# Altium PCB PCB2.PcbDoc
Units mm, origin at the board's own origin, x right, y up, seen from the top; angles counter-clockwise.
Board outline 27.05 x 25 mm, 2 copper layers (Top Layer, Bottom Layer); 12 components, 12 nets, 43 pads, 10 vias.
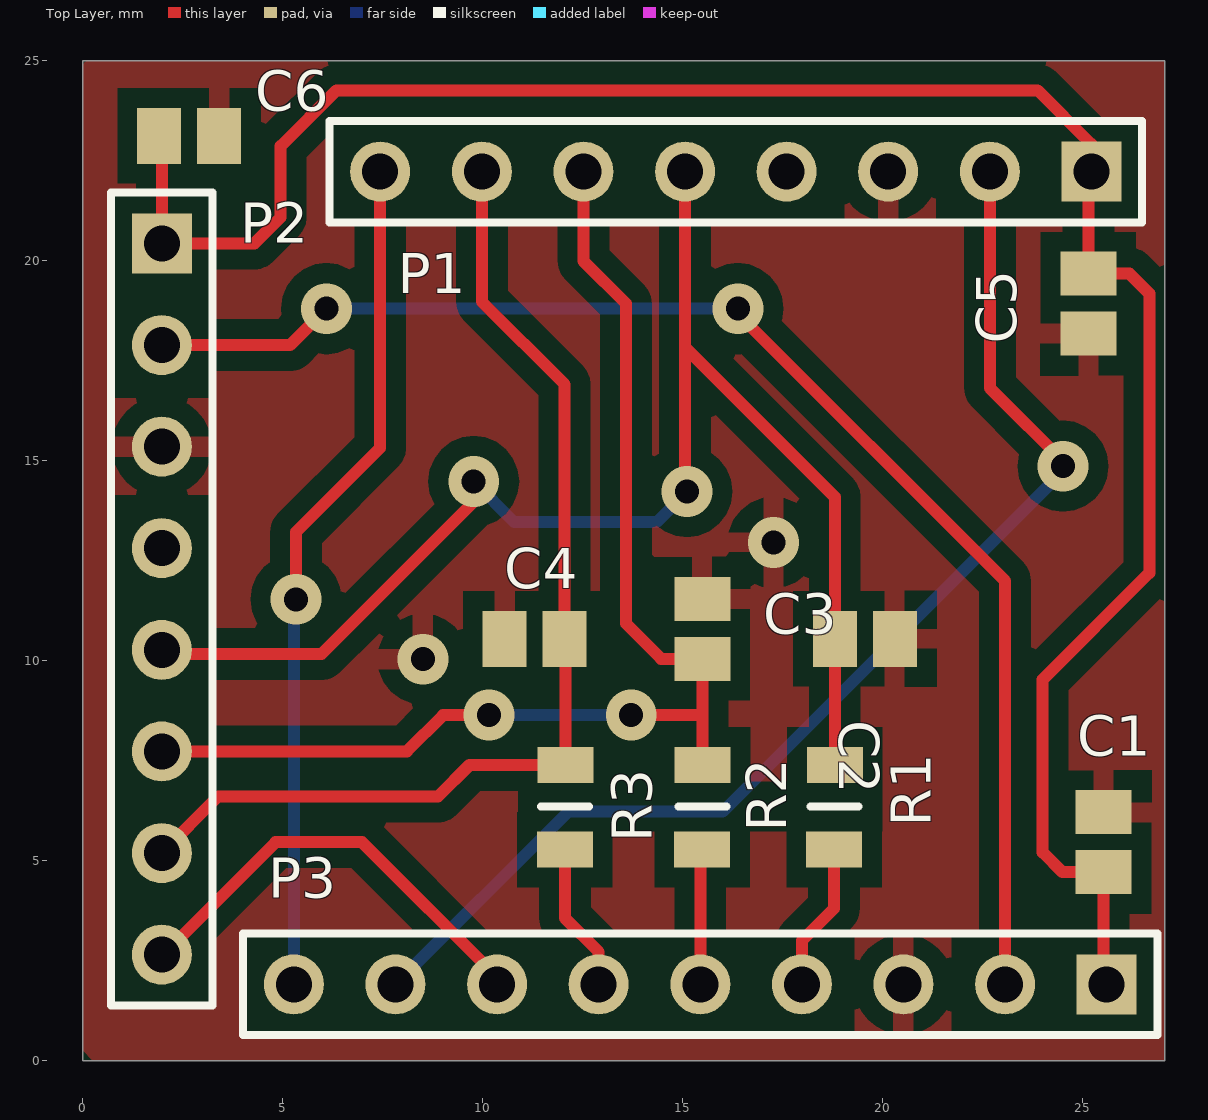
[diagram p0: Top Layer view]
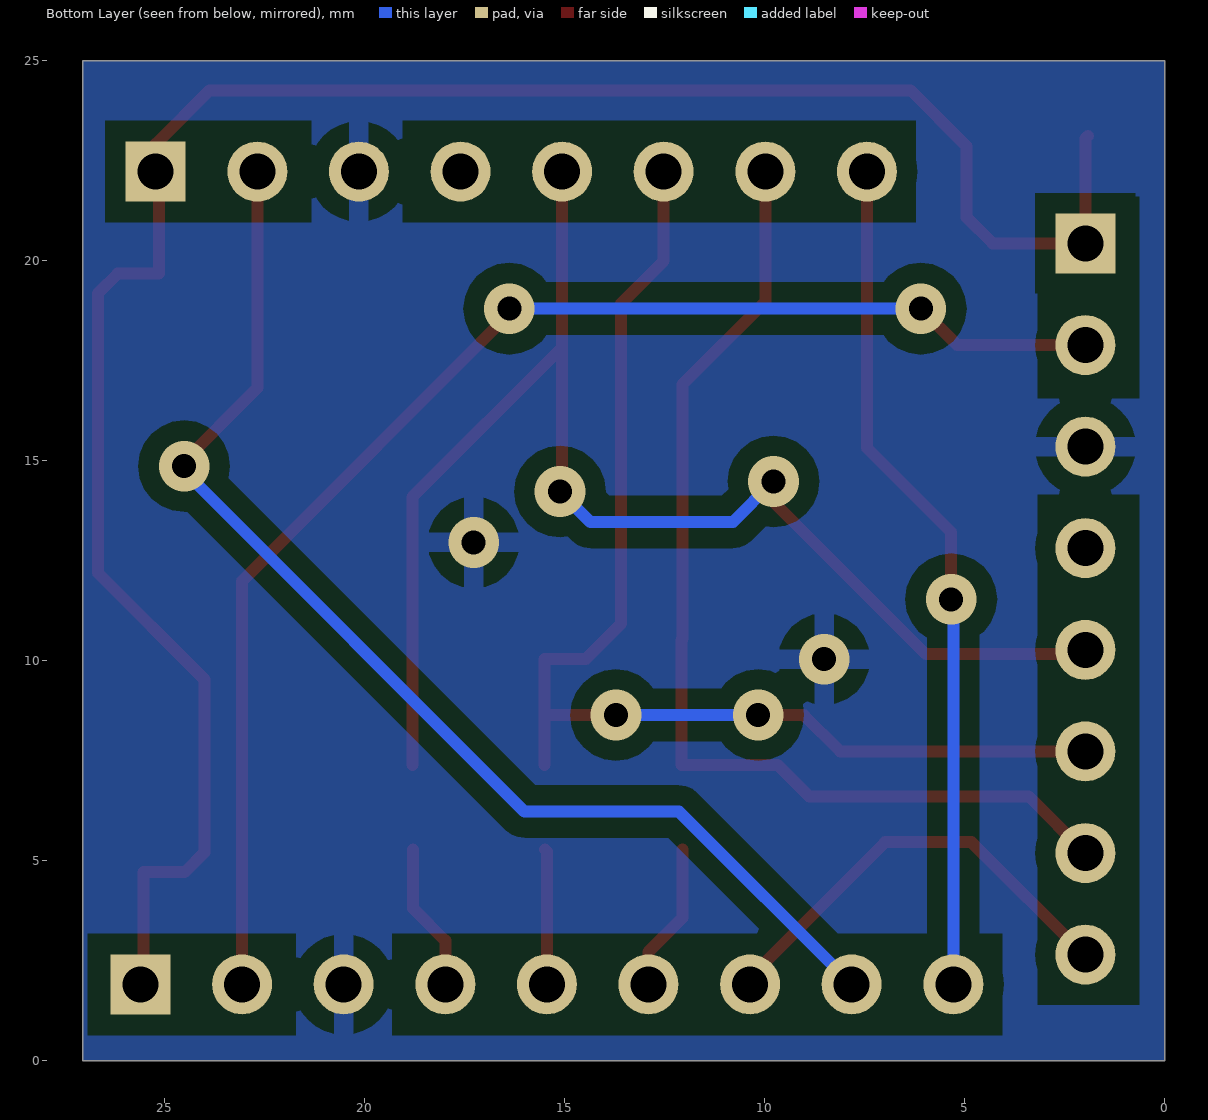
[diagram p1: Bottom Layer view, seen from below]

## Layer stack, top to bottom
Top Solder: solder mask 0.0102, Solder Resist, Dk 3.5
Top Layer: signal copper 0.0356
Dielectric 1: dielectric 0.32, FR-4, Dk 4.8
Bottom Layer: signal copper 0.0356
Bottom Solder: solder mask 0.0102, Solder Resist, Dk 3.5

## Board outline
0,0 0,25 27.051,25 27.051,0

## Design rules (kind name [scope] priority, off if disabled: settings)
Clearance [All] p1: gap=0.3
PlaneConnect [All] p1: planeconnectstyle=Relief reliefexpansion=0.5 reliefentries=4 reliefconductorwidth=0.5 reliefairgap=0.5
PolygonConnect [All] p1: connectstyle=Relief reliefconductorwidth=0.5 reliefentries=4 polygonreliefangle="90 Angle" airgapwidth=0.5
RoutingVias [All] p1: holewidth=0.6 width=1.5 viastyle="Through Hole" minholewidth=0.6 minwidth=1.27 maxholewidth=0.9 maxwidth=1.6
SolderMaskExpansion [All] p1: expansion=0.102
Width [All] p1: maxlimit=0.5 minlimit=0.3 preferedwidth=0.3
28 further rules are at their usual default settings.

## Components (designator, comment, footprint, x,y, rotation, side; value= is the part's Value field where it differs from the comment)
C1 "Cap" C0805 25.527,5.461 r270 top
C2 "Cap" C0805 19.558,10.541 r180 top
C3 "Cap" C0805 15.494,10.795 r90 top
C4 "Cap" C0805 11.303,10.541 r180 top
C5 "Cap" C0805 25.146,18.923 r90 top
C6 "Cap" C0805 2.667,23.114 r180 top
P1 "Header 8" HDR1X8 25.222,22.225 r180 top locked
P2 "Header 8" HDR1X8 1.981,20.428 r270 top locked
P3 "Header 9" HDR1X9 25.603,1.905 r180 top locked
R1 "Res2" 6-0805_N 18.796,6.35 r270 top
R2 "Res2" 6-0805_N 15.494,6.35 r270 top
R3 "Res2" 6-0805_N 12.065,6.35 r270 top

## Footprints (in the part's own frame and the unit in brackets; to place one, negate y for a bottom-side part, rotate by r counter-clockwise, add the part's x,y. Pads: shape width x height; smd on the part's side, far side on the other; paste and mask are expansions set on the pad)
6-0805_N [mm] "Chip Resistor, Body 2.0x1.2mm, IPC Medium Density"
  rect 0.9x1.4 smd: 1(-1.039,0.009) 2(1.078,-0.007)
  silkscreen extent 0,-0.6 0,0.6, body extent -1.07,-0.7 1.07,0.7, height 0.7
C0805 [mm]
  rect 1.1x1.4 smd: 1(-0.75,0) 2(0.75,0)
  body extent -1.1,-0.72 1.1,0.72, height 1.4
HDR1X8 [mm] "Connector; Header; 8 Position"
  rect 1.5x1.5 hole 0.9: 1(0,0)
  round 1.5 hole 0.9: 2(2.54,0) 3(5.08,0) 4(7.62,0) 5(10.16,0) 6(12.7,0) 7(15.24,0) 8(17.78,0)
  silkscreen extent -1.27,-1.27 19.05,1.27
HDR1X9 [mm] "Connector; Header; 9 Position"
  rect 1.5x1.5 hole 0.9: 1(0,0)
  round 1.5 hole 0.9: 2(2.54,0) 3(5.08,0) 4(7.62,0) 5(10.16,0) 6(12.7,0) 7(15.24,0) 8(17.78,0) 9(20.32,0)
  silkscreen extent -1.27,-1.27 21.59,1.27

## Part data
C1 C2 C3 C4 C5 C6: "Capacitor"
P1 P2: "Header, 8-Pin"
P3: "Header, 9-Pin"
R1 R2 R3: "Resistor"

## Via types
v1: diameter 1.27, hole 0.6, Top Layer to Bottom Layer, 10 vias

## Nets (pads, with @x,y where several pads share a name; then routed paths per layer and width w, separated by ;. In a path a pad name is that pad's centre, name@x,y a point inside that pad or via, vN(x,y) a via of type N, cw(c..) or ccw(c..) an arc to the next point about the centre after c; other vN are vias at no path point)
3.3V: C1.2 C5.2 C6.2 P1.1 P2.1 P3.1 | length 54.2
  Top Layer w0.3: C6.2 1.981,23.05 P2.1 4.299,20.428 4.953,21.082 4.953,22.86 6.35,24.257 23.876,24.257 25.222,22.911 P1.1 25.146,22.149 C5.2 26.174,19.673 26.67,19.177 26.67,12.192 24.003,9.525 24.003,5.207 24.499,4.711 C1.2 25.527,2.286 25.908,1.905 P3.1
GND: C1.1 C2.1 C3.2 C4.2 C5.1 C6.1 P1.3 P2.3 P3.3 | length 0.2
  Top Layer w0.3: v1(17.272,12.954) v1@17.399,12.827
  other v1: 8.509,10.033
MISO: C2.2 P1.5 P2.5 R1.1 | length 36.2
  Top Layer w0.3: P2.5 2.089,10.16 5.969,10.16 9.97,14.16 v1@9.97,14.541 ; P1.5 15.062,17.831 ; v1(15.113,14.224) 15.062,14.275 15.062,17.831 ; R1.1 18.805,14.088 15.062,17.831
  Bottom Layer w0.3: v1(9.779,14.478) 10.795,13.462 14.351,13.462 v1(15.113,14.224)
MOSI: C3.1 P1.6 P2.6 R2.1 | length 30.6
  Top Layer w0.3: P2.6 8.109,7.728 9.017,8.636 v1(10.16,8.636) ; P1.6 12.522,19.99 13.589,18.923 13.589,10.922 14.466,10.045 C3.1 15.503,10.036 15.503,8.636 ; v1(13.716,8.636) 15.503,8.636 ; R2.1 15.503,8.636
  Bottom Layer w0.3: v1(10.16,8.636) v1(13.716,8.636)
NetP3_4: P3.4 R1.2 | length 3.7
  Top Layer w0.3: P3.4 17.983,2.997 18.789,3.803 R1.2
NetP3_5: P3.5 R2.2 | length 3.4
  Top Layer w0.3: P3.5 15.443,5.228 R2.2
NetP3_6: P3.6 R3.2 | length 3.7
  Top Layer w0.3: R3.2 12.058,3.563 12.903,2.718 P3.6
RST1: P2.2 P3.2 | length 34.6
  Top Layer w0.3: P2.2 5.188,17.888 v1(6.096,18.796) ; v1(16.383,18.796) 16.256,18.796 23.063,11.989 P3.2
  Bottom Layer w0.3: v1(6.096,18.796) v1(16.383,18.796)
RST2: P1.2 P3.8 | length 30.3
  Top Layer w0.3: P1.2 22.682,16.815 v1@24.638,14.859
  Bottom Layer w0.3: P3.8 12.141,6.223 16.002,6.223 v1@24.575,14.795
  other v1: 24.511,14.859
SCK: C4.1 P1.7 P2.7 R3.1 | length 26.7
  Top Layer w0.3: P2.7 3.397,6.604 8.89,6.604 9.675,7.389 R3.1 12.074,10.52 C4.1 12.053,16.903 9.982,18.974 P1.7
SS1: P2.8 P3.7 | length 11.1
  Top Layer w0.3: P2.8 2.013,2.648 4.826,5.461 6.985,5.461 10.363,2.083 P3.7
SS2: P1.8 P3.9 | length 21.2
  Top Layer w0.3: v1(5.334,11.532) 5.334,13.208 7.442,15.316 P1.8
  Bottom Layer w0.3: P3.9 5.283,11.481 v1(5.334,11.532)
pads on no net: P1.4 P2.4

## Polygon pours and split planes (outlines as drawn)
GND on Bottom Layer "Bottom Layer-No Net" (solid, pour order 4): 0,25 27.051,25 27.051,0 0,0
GND on Top Layer "Bottom Layer-No Net" (solid, pour order 6): 0,25 27.051,25 27.051,0 0.254,0 0,0.254

## Other copper
Top Layer:
  pour cut-out: 10.874,6.985 20.005,6.985 20.005,5.715 10.874,5.715
Multi-Layer:
  pour cut-out: 0.635,21.59 3.175,21.59 3.175,16.555 0.635,16.555
  pour cut-out: 0.635,14.142 3.175,14.142 3.175,1.397 0.635,1.397
  pour cut-out: 4.064,3.175 19.304,3.175 19.304,0.635 4.064,0.635
  pour cut-out: 21.717,3.175 26.924,3.175 26.924,0.635 21.717,0.635
  pour cut-out: 6.223,23.495 19.05,23.495 19.05,20.955 6.223,20.955
  pour cut-out: 21.336,23.495 21.336,20.955 26.479,20.955 26.479,23.495